# Altium PCB nrf52832_qfax_dcdc.PcbDoc
Units mm, origin at the board's own origin, x right, y up, seen from the top; angles counter-clockwise.
Board outline 19.99 x 19.99 mm, 2 copper layers (Top Layer, Bottom Layer), stack 1.671 mm thick; 24 components, 46 nets, 116 pads, 61 vias.
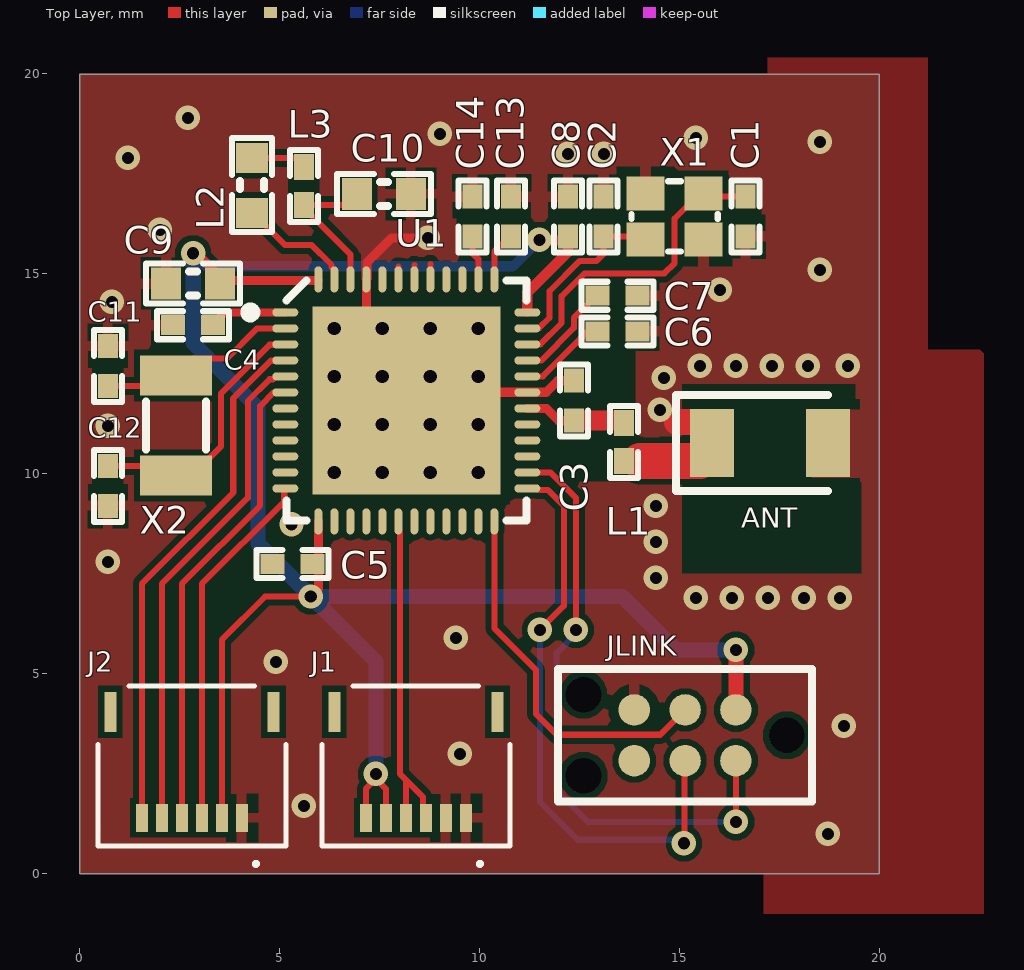
[diagram p0: Top Layer view]
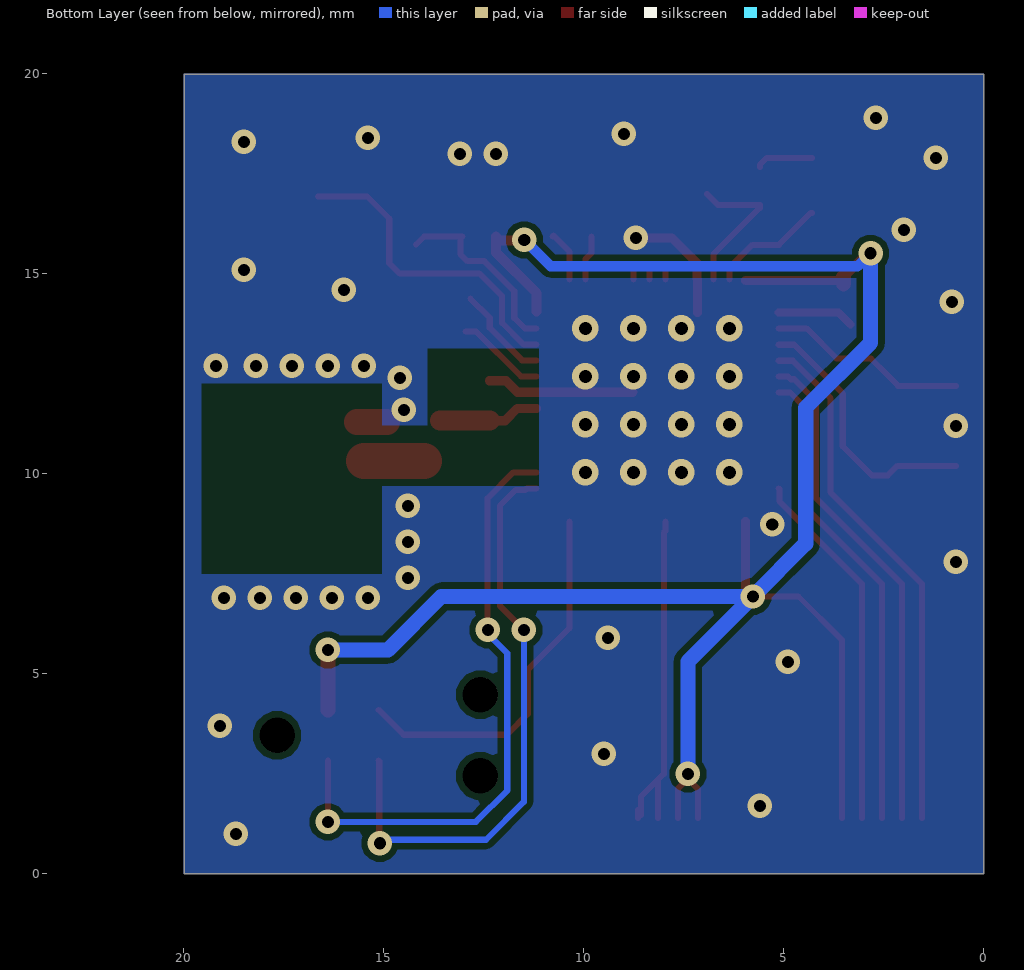
[diagram p1: Bottom Layer view, seen from below]
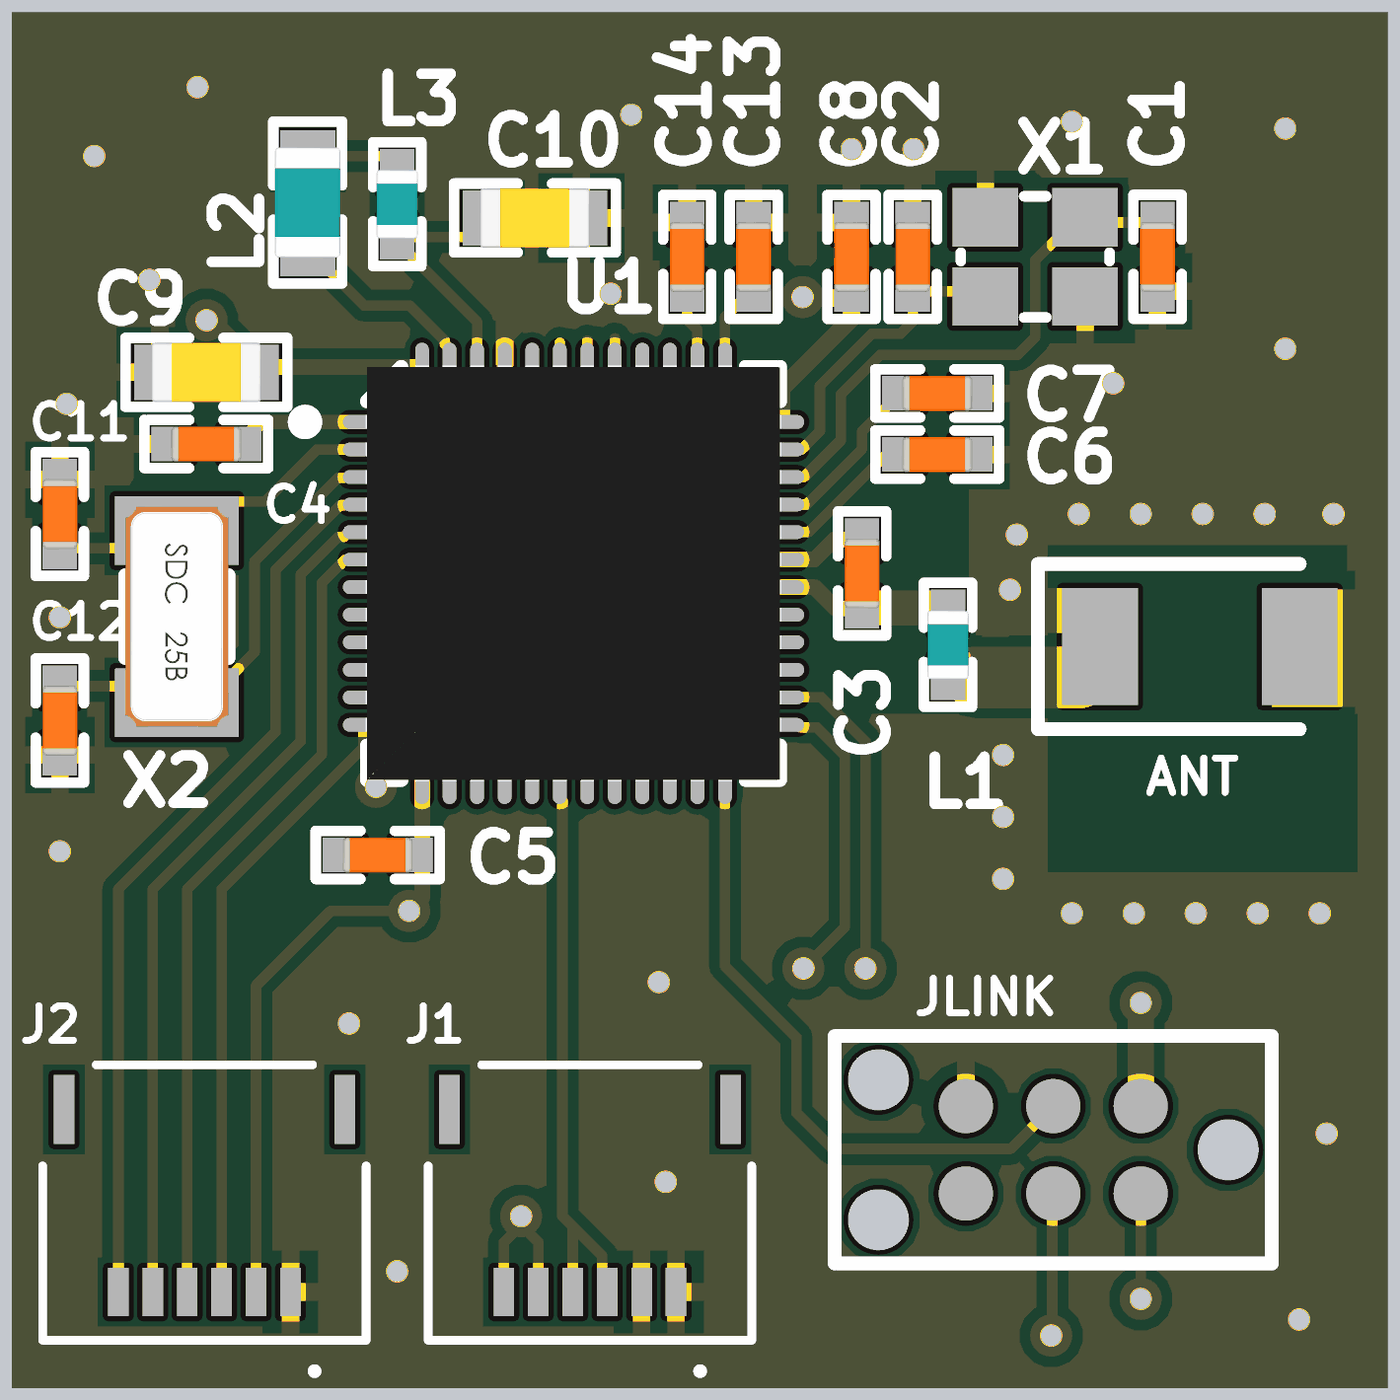
[diagram p2: 3D render of the assembled board from above, using the file's embedded part models]

## Layer stack, top to bottom
Top Solder: solder mask 0.0102, Solder Resist, Dk 3.5
Top Layer: signal copper 0.0356
Dielectric1: core 1.6002, FR-4, Dk 4.8
Bottom Layer: signal copper 0.0356
Bottom Solder: solder mask 0.0102, Solder Resist, Dk 3.5

## Board outline
0,0 0,19.99 19.99,19.99 19.99,0

## Design rules (kind name [scope] priority, off if disabled: settings)
Clearance Clearance_7 [InNamedPolygon('GND_L01_P004')] p1: gap=0.13 ignorepadtopadclearanceinfootprint=FALSE except(0: Arc-Hole Track-Hole SMDPad-Hole THPad-Hole Via-Hole Fill-Hole Poly-Hole Region-Hole Text-Hole)
Clearance Clearance_6 [InNamedPolygon('GND_L01_P004')] p2: gap=0.13 ignorepadtopadclearanceinfootprint=FALSE
Clearance Clearance_5 [InNamedPolygon('GND_L01_P001')] p3: gap=0.13 ignorepadtopadclearanceinfootprint=FALSE
Clearance Clearance_4 [InNamedPolygon('NONET_L01_P002')] p4: gap=0.254 ignorepadtopadclearanceinfootprint=FALSE except(0: Arc-Hole Track-Hole SMDPad-Hole THPad-Hole Via-Hole Fill-Hole Poly-Hole Region-Hole Text-Hole)
Clearance Clearance_3 [InNamedPolygon('GND_L01_P001')] p5: gap=0.13 ignorepadtopadclearanceinfootprint=FALSE
Clearance Clearance_2 [InNamedPolygon('GND_L01_P000')] p6: gap=0.13 ignorepadtopadclearanceinfootprint=FALSE
Clearance Clearance_1 [InNamedPolygon('GND_L01_P000')] p7: gap=0.13 ignorepadtopadclearanceinfootprint=FALSE
Clearance Polygon_ANT [(InNamedPolygon('Top_Layer-GND')) or (InNamedPolygon('Bottom_Layer-GND')) vs InNet('RF')] p8: gap=0.127 ignorepadtopadclearanceinfootprint=FALSE except(0: Arc-Hole Track-Hole SMDPad-Hole THPad-Hole Via-Hole Fill-Hole Poly-Hole Region-Hole Text-Hole)
Clearance Polygon [(InNamedPolygon('Top_Layer-GND')) or (InNamedPolygon('Bottom_Layer-GND'))] p9: gap=0.254 ignorepadtopadclearanceinfootprint=FALSE except(0: Arc-Hole Track-Hole SMDPad-Hole THPad-Hole Via-Hole Fill-Hole Poly-Hole Region-Hole Text-Hole)
Clearance [All] p10: gap=0.152 ignorepadtopadclearanceinfootprint=FALSE except(0: Arc-Hole Track-Hole SMDPad-Hole THPad-Hole Via-Hole Fill-Hole Poly-Hole Region-Hole Text-Hole)
ComponentClearance [All] p1 off: gap=0.254 collisioncheckmode=3 verticalgap=0.254 showdistances=FALSE
FabricationTestPointUsage TestPointUsage [All] p1: valid=0 allowmultiple=FALSE
FabricationTestpoint Testpoint [All] p1: side=3 testpointundercomponent=TRUE minsize=1.016 maxsize=2.54 preferedsize=1.524 minholesize=0 maxholesize=1.016 preferedholesize=0.813 testpointgrid=0.025 allowsidetop=TRUE allowsidebottom=TRUE usegrid=TRUE gridtolerance=0
Height [All] p1 off: minheight=0 maxheight=25.4 prefheight=12.7
HoleSize [All] p1: absolutevalues=TRUE maxlimit=4.064 minlimit=0.305 maxpercent=80.000 minpercent=20.000
MinimumAnnularRing [All] p1 off: minimumring=0.152
PolygonConnect PolygonConnect_2 [All vs IsNamedPolygon('GND_L01_P008')] p1: connectstyle=Direct reliefconductorwidth=0.254 reliefentries=4 polygonreliefangle="90 Angle" airgapwidth=0.254
PolygonConnect PolygonConnect_1 [isVia and innet(gnd)] p2: connectstyle=Direct reliefconductorwidth=0.254 reliefentries=4 polygonreliefangle="90 Angle" airgapwidth=0.254
PolygonConnect [All] p3: connectstyle=Relief reliefconductorwidth=0.254 reliefentries=4 polygonreliefangle="90 Angle" airgapwidth=0.254
RoutingVias [All] p1: holewidth=0.406 width=0.813 viastyle="Through Hole" minholewidth=0.254 minwidth=0.254 maxholewidth=0.711 maxwidth=1.27
SilkToSolderMaskClearance SilkscreenOverComponentPads [IsPad] p1: minsilkscreentomaskgap=0.254 clearancetoexposedcopper=TRUE
SolderMaskExpansion [All] p1: expansion=0.076 istentingtop=FALSE
Width [All] p1: maxlimit=2.54 minlimit=0.152 preferedwidth=0.152
24 further rules are at their usual default settings.

## Classes and differential pairs
polygon class PolygonClass_1: GND_L01_P001

## Components (designator, comment, footprint, x,y, rotation, side; value= is the part's Value field where it differs from the comment)
ANT "Comment" ANTC3216X115N 17.258,10.775 r0 top
C1 "12pF" CAPC1005X04L 16.645,16.435 r270 top
C2 "12pF" CAPC1005X04L 13.089,16.435 r90 top
C3 "0.8pF" CAPC1005X04L 12.352,11.837 r270 top
C4 "100nF" CAPC1005X04L 2.827,13.717 r180 top
C5 "100nF" CAPC1005X04L 5.317,7.748 r180 top
C6 "N.C." CAPC1005X04L 13.445,13.564 r180 top
C7 "100pF" CAPC1005X04L 13.445,14.453 r0 top
C8 "100nF" CAPC1005X04L 12.2,16.435 r90 top
C9 "4.7µF" CAPC1608X06L 2.827,14.758 r180 top
C10 "1.0µF" CAPC1608X06L 7.6,17 r180 top
C11 "12pF" CAPC1005X04L 0.7,12.7 r90 top
C12 "12pF" CAPC1005X04L 0.7,9.7 r270 top
C13 "12pF" CAPC1005X04L 10.777,16.435 r90 top
C14 "12pF" CAPC1005X04L 9.812,16.435 r90 top
J1 "5034800600" MOLEX_5034800600 8.4,2.8 r180 top
J2 "5034800600" MOLEX_5034800600 2.8,2.8 r180 top
JLINK "ICSP" TC2030-MCP-NL 17.67,3.465 r180 top (schematic designator C?)
L1 "3.9nH" INDC1005X04L 13.6,10.8 r270 top
L2 "10µH" INDC1608X06L 4.3,17.225 r270 top
L3 "15nH" INDC1005X04L 5.6,17.2 r90 top
U1 "nRF52832-QFAB" QFN40P600X600X90-48N 8.161,11.837 r0 top locked
X1 "32MHz" BT-XTAL_2016 14.867,16.435 r180 top
X2 "32.768kHz" XTAL_3215 2.4,11.21 r270 top

## Footprints (in the part's own frame and the unit in brackets; to place one, negate y for a bottom-side part, rotate by r counter-clockwise, add the part's x,y. Pads: shape width x height; smd on the part's side, far side on the other; paste and mask are expansions set on the pad)
ANTC3216X115N [mm]
  rect 1.1x1.7 smd: 1(-1.45,0) 2(1.45,0)
  silkscreen extent -2.35,-1.2 1.45,1.2
BT-XTAL_2016 [mm] "Crystal 2.0 x 1.6 mm"
  rect 0.95x0.85 smd: 1(-0.725,-0.575) 2(0.725,-0.575) 3(0.725,0.575) 4(-0.725,0.575)
  silkscreen extent -1.08,-0.88 1.08,0.88
CAPC1005X04L [mm] "Chip Capacitor, 2-Leads, Body 1.0x0.5mm, IPC High Density"
  rect 0.6x0.5 smd: 1(-0.5,0) 2(0.5,0)
  silkscreen extent -0.9,-0.35 0.9,0.35, body extent -0.51,-0.25 0.51,0.25, height 0.5
CAPC1608X06L [mm] "Chip Capacitor, 2-Leads, Body 1.6x0.8mm, IPC High Density"
  rect 0.75x0.8 smd: 1(-0.675,0) 2(0.675,0)
  silkscreen extent -1.17,-0.5 1.17,0.5, body extent -0.8,-0.43 0.8,0.43, height 0.8
INDC1005X04L [mm] "Chip Inductor, 2-Leads, Body 1.0x0.5mm, IPC High Density"
  rect 0.65x0.5 smd: 1(-0.475,0) 2(0.475,0)
  silkscreen extent -0.9,-0.35 0.9,0.35, body extent -0.5,-0.3 0.5,0.3, height 0.5
INDC1608X06L [mm] "Chip Inductor, 2-Leads, Body 1.6x0.8mm, IPC High Density"
  rect 0.75x0.8 smd: 1(-0.675,0) 2(0.7,0)
  silkscreen extent -1.18,-0.5 1.17,0.5, body extent -0.8,-0.48 0.8,0.48, height 0.8
MOLEX_5034800600 [mm]
  rect 0.3x0.7 smd: 1(-1.25,1.4) 2(-0.75,1.4) 3(-0.25,1.4) 4(0.25,1.4) 5(0.75,1.4) 6(1.25,1.4)
  rect 0.3x1 smd: S1(-2.04,-1.25) S2(2.04,-1.25)
  silkscreen extent -2.35,-1.9 2.35,2.6
QFN40P600X600X90-48N [mm] "QFN, 48-Leads, Body 6,0x6,0mm (max), Pitch 0,40mm, IPC Medium Density"
  oval 0.65x0.2 smd: 1(-3.025,2.2) 2(-3.025,1.8) 3(-3.025,1.4) 4(-3.025,1) 5(-3.025,0.6) 6(-3.025,0.2) 7(-3.025,-0.2) 8(-3.025,-0.6) 9(-3.025,-1) 10(-3.025,-1.4) 11(-3.025,-1.8) 12(-3.025,-2.2) 25(3.025,-2.2) 26(3.025,-1.8) 27(3.025,-1.4) 28(3.025,-1) 29(3.025,-0.6) 30(3.025,-0.2) 31(3.025,0.2) 32(3.025,0.6) 33(3.025,1) 34(3.025,1.4) 35(3.025,1.8) 36(3.025,2.2)
  oval 0.2x0.65 smd: 13(-2.2,-3.025) 14(-1.8,-3.025) 15(-1.4,-3.025) 16(-1,-3.025) 17(-0.6,-3.025) 18(-0.2,-3.025) 19(0.2,-3.025) 20(0.6,-3.025) 21(1,-3.025) 22(1.4,-3.025) 23(1.8,-3.025) 24(2.2,-3.025) 37(2.2,3.025) 38(1.8,3.025) 39(1.4,3.025) 40(1,3.025) 41(0.6,3.025) 42(0.2,3.025) 43(-0.2,3.025) 44(-0.6,3.025) 45(-1,3.025) 46(-1.4,3.025) 47(-1.8,3.025) 48(-2.2,3.025)
  rect 4.7x4.7 smd: 49(0,0)
  silkscreen extent -4.02,-3 3,3, body extent -3.02,-3.02 3.02,3.02, height 0.86
TC2030-MCP-NL [mil]
  round 31 smd: 1(50,-25) 2(50,25) 3(100,-25) 4(100,25) 5(150,-25) 6(150,25)
  round 34 hole 35 unplated: A(0,0) B(200,40) C(200,-40)
  silkscreen extent -25,-65 225,65
XTAL_3215 [mm] "XTAL SMD 3.2 x 1.5 mm"
  rect 1x1.8 smd: 1(-1.25,0) 2(1.25,0)
  silkscreen extent -0.6,-0.75 0.6,0.75, body extent -1.6,-0.75 1.6,0.75, height 0.81

## Part data
C1 C2 C11 C12 C13 C14: library part C0402-12p, "Capacitor, NP0, ±2%", Artikkelnr Noca=20029159, Artikkelnr Simpro=N.A., Footprint Doc=0402, LatestRevisionDate=2011-05-11, Note=50V, Part Number=C0402-12p, Pin Count=2, Published=2009-05-08, Publisher="Nordic Semiconductor"
C3: library part C0402-0.8p, "Capacitor, NP0, ±5%", Artikkelnr Noca=20029147, Artikkelnr Simpro=N.A., Footprint Doc=0402, LatestRevisionDate=2012-11-21, Note=50V, Part Number=C0402-0.8p, Pin Count=2, Published=2009-05-08, Publisher="Nordic Semiconductor"
C4 C5 C8: library part C0402-100n, "Capacitor, X7R, ±10%", Artikkelnr Noca=20039200, Artikkelnr Simpro=N.A., Footprint Doc=0402, LatestRevisionDate=2009-11-23, Note=16V, Part Number=C0402-100n, Pin Count=2, Published=2009-05-08, Publisher="Nordic Semiconductor"
C6: library part C0402-N.C., "Not mounted", Artikkelnr Noca=N.A., Artikkelnr Simpro=N.A., Footprint Doc=0402, LatestRevisionDate=2009-05-08, Note="Chip Cap", Part Number=C0402-N.C., Pin Count=2, Published=2009-05-08, Publisher="Nordic Semiconductor"
C7: library part C0402-100p, "Capacitor, NP0, ±5%", Artikkelnr Noca=20029135, Artikkelnr Simpro=N.A., Footprint Doc=0402, LatestRevisionDate=2009-05-08, Note=50V, Part Number=C0402-100p, Pin Count=2, Published=2009-05-08, Publisher="Nordic Semiconductor"
C9: library part C0603-4µ7, "Capacitor, X5R, ±10%", Artikkelnr Noca=20069060, Artikkelnr Simpro=N.A., Footprint Doc=0603, LatestRevisionDate=2009-11-23, Note=6.3V, Part Number=C0603-4µ7, Pin Count=2, Published=2009-05-08, Publisher="Nordic Semiconductor"
C10: library part C0603-1µ0, "Capacitor, X7R, ±10%", Artikkelnr Noca=20039335, Artikkelnr Simpro=N.A., Footprint Doc=0603, LatestRevisionDate=2013-06-05, Note=16V, Part Number=C0603-1µ0, Pin Count=2, Published=2009-05-08, Publisher="Nordic Semiconductor"
J1 J2: library part CMP-011-000000-1, "6 Position FFC, FPC Connector Contacts, Top and Bottom 0.020 _0.50mm_ Surface Mount, Right Angle", Package=None, Availability=Unavailable, Component Type=Standard, Design Item ID=5034800600, MF=Molex, MP=5034800600, Pin Count=8, Price=None, SnapEDA_Link=https://www.snapeda.com/parts/5034800600/Molex/view-part/1319072/?ref=snap, Source=SnapEDAsch.SchLib
L1: library part L0402-3n9, "High frequency chip inductor ±5%", Manufacturer=Murata, Manufacturer Part Number=LQP15MN3N9B02D, Supplier part number=490-1131-1-ND, Artikkelnr Noca=33029151, Artikkelnr Simpro=N.A., Datasheet=http://search.murata.co.jp/Ceramy/image/img/PDF/ENG/L0075S0084LQP15M.pdf, Footprint Doc=0402, LatestRevisionDate=2012-09-19, Note="High frequency chip inductor ±5%", Part Number=L0402-3n9, Pin Count=2, Published=2009-05-08, Publisher="Nordic Semiconductor", Supplier=Digi-Key
L2: library part L0603-10µ, "Chip inductor, IDC,min = 50 mA, ±20%", 2nd source part number=178-6105, Manufacturer="Taiyo Yuden", Manufacturer Part Number=LBMF1608T100K, Supplier part number=587-1714-1-ND, 2nd source Supplier=Farnell, Artikkelnr Noca=33029314, Artikkelnr Simpro=N.A., Datasheet=http://www.yuden.co.jp/ut/product/pdf/elb2_e.pdf, Footprint Doc=0603, LatestRevisionDate=2012-09-19, Note="LBMF1608T100K 10µH 80mA 0603", Part Number=L0603-10µ, Pin Count=2, Published=2010-02-24, Publisher="Nordic Semiconductor", Supplier=Digi-Key
L3: library part L0402-15n, "High frequency chip inductor ±10%", 2nd source part number=658-1328, Manufacturer="Taiyo Yuden", Manufacturer Part Number=HK100515NJ-T, Supplier part number=587-1521-1-ND, 2nd source Supplier=Farnell, Artikkelnr Noca=33029323, Artikkelnr Simpro=N.A., Datasheet=http://www.yuden.co.jp/productdata/catalog/en/mlci04_e.pdf, Footprint Doc=0402, LatestRevisionDate=2012-09-19, Note="High frequency chip inductor ±10%", Part Number=L0402-15n, Pin Count=2, Published=2010-07-12, Publisher="Nordic Semiconductor", Supplier=Digi-Key
U1: "Multi-protocol Bluetooth Low Energy, ANT and 2.4GHz proprietary system-on-chip", Manufacturer="Nordic Semiconductor", Artikkelnr Noca=N.A., Artikkelnr Simpro=N.A., Footprint Doc=QFN-48, LatestRevisionDate=2016-11-24, Manufacturer Part Number=nRF52832-QFAB, Part Number=nRF52832-QFAB, Pin Count=48, Published=2016-11-24, Publisher="Nordic Semiconductor", Supplier="Nordic Semiconductor"
X1: library part XTAL_SMD2016_32MHz_8pF_General, "XTAL SMD 2016, 32MHz, Cl=8pF, Total Tol: ±40ppm", Artikkelnr Noca=N.A., Artikkelnr Simpro=N.A., Footprint Doc=XTAL_2016, LatestRevisionDate=2016-08-19, Note="XTAL SMD 32.000MHz", Part Number=XTAL_SMD2016_32MHz_8pF_General, Pin Count=4, Published=2016-08-19, Publisher="Nordic Semiconductor"
X2: library part XTAL_SMD3215_32.768kHz_9pF_General, "XTAL SMD 3215, 32.768kHz, Cl=9pF, Total Tol: ±50ppm", Artikkelnr Noca=N.A., Artikkelnr Simpro=N.A., Footprint Doc=XTAL_3215, LatestRevisionDate=2016-08-19, Note="XTAL SMD 32.768kHz", Part Number=XTAL_SMD3215_32.768kHz_9pF_General, Pin Count=2, Published=2016-08-19, Publisher="Nordic Semiconductor"

## Via types
v1: diameter 0.61, hole 0.305, Top Layer to Bottom Layer, tented both sides, 45 vias
v2: diameter 0.66, hole 0.33, Top Layer to Bottom Layer, tented both sides, 16 vias

## Nets (pads, with @x,y where several pads share a name; then routed paths per layer and width w, separated by ;. In a path a pad name is that pad's centre, name@x,y a point inside that pad or via, vN(x,y) a via of type N, cw(c..) or ccw(c..) an arc to the next point about the centre after c; other vN are vias at no path point)
DEC1: C4.1 U1.1 | length 1.9
  Top Layer w0.203: C4.1@3.331,13.736 3.632,14.037 U1.1
DEC2: C6.2 U1.32 | length 2.2
  Top Layer w0.152: U1.32 11.573,12.437 12.7,13.564 C6.2@12.962,13.564
DEC3: C7.1 U1.33 | length 2.4
  Top Layer w0.152: U1.33 11.541,12.837 12.352,13.648 12.352,13.899 C7.1@12.837,14.384
DEC4: C10.2 L3.1 U1.46 | length 3.8
  Top Layer w0.152: U1.46 6.761,15.489 5.6,16.65 L3.1 6.65,16.725 C10.2
GND: ANT.2 C1.2 C2.2 C3.1 C4.2 C5.2 C6.1 C7.2 C8.2 C9.2 C10.1 C11.2 C12.2 C13.2 C14.2 J1.1 J1.2 J2.1 JLINK.5 U1.31 U1.45 U1.49 X1.2 X1.4 | length 8
  Top Layer w0.152: v1(14.5,11.6) 14.624,11.6 14.924,11.3
  Top Layer w0.229: U1.49@7.161,14.037 U1.45 7.176,14.877 7.176,15.276 7.8,15.9 v1(8.7,15.9) ; U1.49@8.779,12.04 11.661,12.04 11.948,12.327 C3.1@12.36,12.327
  Top Layer w0.65: 14.924,11.3 15.675,11.3
  other v1: 18.7,1 5.6,1.7 9.5,3 19.1,3.7 4.9,5.3 9.4,5.9 15.4,6.9 16.3,6.9 17.2,6.9 18.1,6.9 19,6.9 14.4,7.4 0.7,7.8 14.4,8.3 5.292,8.737 14.4,9.2 0.7,11.2 14.6,12.4 15.5,12.7 16.4,12.7 17.3,12.7 18.2,12.7 19.2,12.7 0.8,14.3 16,14.6 18.5,15.1 2,16.1 1.2,17.9 12.2,18 13.1,18 18.5,18.3 15.4,18.4 9,18.5 2.7,18.9
  other v2: 6.361,10.037 7.561,10.037 8.761,10.037 9.961,10.037 6.361,11.237 7.561,11.237 8.761,11.237 9.961,11.237 6.361,12.437 7.561,12.437 8.761,12.437 9.961,12.437 6.361,13.637 7.561,13.637 8.761,13.637 9.961,13.637
NetANT?_G1: 
NetC3_2: C3.2 L1.1 U1.30 | length 2.5
  Top Layer w0.229: U1.30 11.661,11.637 11.971,11.327 C3.2@12.36,11.327
  Top Layer w0.508: C3.2@12.356,11.332 L1.1@13.596,11.332
NetC?_2: JLINK.2 U1.26 | length 15.3
  Top Layer w0.152: U1.26 11.763,10.037 12.405,9.395 12.405,6.105 v1(12.4,6.1) ; v1(16.4,1.3) JLINK.2
  Bottom Layer w0.152: v1(12.4,6.1) 12.4,6 11.917,5.517 11.917,2.083 12.7,1.3 v1(16.4,1.3)
NetL2_1: L2.1 L3.2 | length 1.4
  Top Layer w0.152: L2.1 5.426,17.9 5.6,17.726 L3.2
NetL2_2: L2.2 U1.47 | length 2.9
  Top Layer w0.152: L2.2 4.325,16.525 5.125,15.725 5.789,15.725 6.29,15.223 6.29,15.171 6.361,15.1 U1.47
P0.00/XL1: C11.1 U1.2 X2.1 | length 5
  Top Layer w0.152: C11.1 2.14,12.2 X2.1 2.824,12.884 3.68,12.884 4.433,13.637 U1.2
P0.01/XL2: C12.1 U1.3 X2.2 | length 6.7
  Top Layer w0.152: C12.1 2.16,10.2 X2.2 2.8,9.96 3.529,10.689 3.529,12.012 4.744,13.228 5.127,13.228 U1.3
P0.02/AIN0: J2.6 U1.4 | length 13.1
  Top Layer w0.152: J2.6 1.55,7.25 3.833,9.533 3.833,11.886 4.775,12.828 5.127,12.828 U1.4
P0.03/AIN1: J2.5 U1.5 | length 12.5
  Top Layer w0.152: J2.5 2.05,7.25 4.2,9.4 4.2,11.822 4.744,12.366 4.827,12.366 4.899,12.437 U1.5
P0.04/AIN2: J2.4 U1.6 | length 11.9
  Top Layer w0.152: J2.4 2.55,7.25 4.505,9.205 4.505,11.695 4.847,12.037 4.899,12.037 U1.6
P0.05/AIN3: U1.7
P0.07: U1.9
P0.08: U1.10
P0.09: U1.11
P0.10: J2.3 U1.12 | length 9.1
  Top Layer w0.152: J2.3 3.05,7.25 5.109,9.309 5.109,9.615 5.131,9.637 U1.12
P0.11: U1.14
P0.12: U1.15
P0.13: U1.16
P0.14: U1.17
P0.15: J1.3 J1.4 U1.18 | length 8.8
  Top Layer w0.152: U1.18 7.961,8.574 8,8.536 8,2.5 8.15,2.35 ; J1.4 8.15,2.35 ; J1.3@8.65,1.6 J1.3 8.576,1.474 8.576,1.924 8.15,2.35
P0.16: U1.19
P0.17: U1.20
P0.18: U1.21
P0.19: U1.22
P0.20: U1.23
P0.21: JLINK.3 U1.24 | length 9.4
  Top Layer w0.152: U1.24 10.361,6.139 11.4,5.1 11.4,4 11.922,3.478 14.508,3.478 JLINK.3
P0.22: U1.27
P0.23: U1.28
P0.24: U1.29
P0.25: C13.1 U1.37 | length 1.3
  Top Layer w0.152: U1.37 10.361,15.562 10.756,15.956 C13.1
P0.26: C14.1 U1.38 | length 1.1
  Top Layer w0.152: C14.1 9.812,15.52 9.961,15.371 U1.38
P0.27: U1.39
P0.28/AIN4: U1.40
P0.29/AIN5: U1.41 | length 0.4
  Top Layer w0.152: U1.41 8.761,15.25
P0.30/AIN6: U1.42 | length 0.4
  Top Layer w0.152: U1.42 8.361,15.219
P0.31/AIN7: U1.43 | length 0.3
  Top Layer w0.152: U1.43 7.961,15.188
RF: L1.2 | length 1.5
  Top Layer w0.9: 14,10.325 15.5,10.325
SWDCLK: JLINK.4 U1.25 | length 14.8
  Top Layer w0.152: U1.25 11.424,9.637 11.461,9.6 11.7,9.6 12.1,9.2 12.1,6.7 v1(11.5,6.1) ; v1(15.1,0.767) 15.115,0.782 15.115,2.815 JLINK.4
  Bottom Layer w0.152: v1(11.5,6.1) 11.5,1.8 12.447,0.853 15.013,0.853 v1(15.1,0.767)
VDD_NRF: C5.1 C8.1 C9.1 J1.5 J1.6 J2.2 JLINK.1 U1.13 U1.36 U1.48 | length 54.6
  Top Layer w0.152: J2.2 3.55,5.85 4.635,6.935 v1(5.774,6.935) ; J1.6 7.15,2.126 v1@7.4,2.376 ; v1(7.4,2.5) v1@7.4,2.376 ; J1.5 7.65,2.126 v1@7.4,2.376
  Top Layer w0.229: v1(2.831,15.514) 2.914,15.514 3.506,14.922 3.591,14.837 U1.48@5.952,14.837 ; v1(5.774,6.935) 5.961,7.123 U1.13
  Top Layer w0.254: U1.36@11.184,14.065 11.184,14.525 12.2,15.541 C8.1@12.2,15.833 ; v1(11.489,15.851) 11.506,15.833 C8.1@12.2,15.833 ; C8.1 C8.1@12.2,15.833
  Top Layer w0.381: C9.1@3.506,14.752 C9.1@3.506,14.922 ; JLINK.1 v1(16.4,5.6)
  Bottom Layer w0.254: v1(2.831,15.514) 3.156,15.19 10.828,15.19 v1(11.489,15.851)
  Bottom Layer w0.381: v1(2.831,15.514) 2.831,13.276 4.454,11.653 4.454,8.255 v1(5.774,6.935) ; v1(7.4,2.5) 7.4,5.309 v1(5.774,6.935) ; v1(16.4,5.6) 14.9,5.6 13.565,6.935 v1(5.774,6.935)
XC1: C1.1 U1.34 X1.1 | length 8
  Top Layer w0.152: U1.34 11.51,13.237 12.045,13.772 12.045,14.44 12.617,15.012 14.613,15.012 14.867,15.266 14.867,16.384 15.418,16.935 C1.1
XC2: C2.1 U1.35 X1.3 | length 4.7
  Top Layer w0.152: U1.35 11.476,13.637 11.74,13.901 11.74,14.57 12.487,15.317 12.911,15.317 13.089,15.495 C2.1@13.089,15.927 ; C2.1@13.038,15.935 13.995,15.935 X1.3@14.195,15.735
pads on no net: ANT.1 J1.S1 J1.S2 J2.S1 J2.S2 JLINK.6 JLINK.A JLINK.B JLINK.C U1.8 U1.44

## Polygon pours and split planes (outlines as drawn)
GND on Top Layer "GND_L01_P011" (solid, pour order 11): 17.1,7.7 19.2,7.7 19.3,7.8 19.3,13.1 22.5,13.1 22.6,13 22.6,-1 17.1,-1
GND on Top Layer "GND_L01_P009" (solid, pour order 9): 21.2,20.4 17.2,20.4 17.2,12.2 21.2,12.2
GND on Top Layer "GND_L01_P008" (solid, pour order 8): 18.3,11.6 18.3,9.9 19.8,9.9 19.8,11.6
GND on Top Layer "GND_L01_P004" (solid, pour order 4): 12.7,10.1 13.4,10.8 14.1,10.8 14.1,12.9 15.7,12.9 15.7,7.5 12.7,7.5
GND on Top Layer "GND_L01_P005" (solid, pour order 5): 0,20 17.8,20 17.8,0 0,0
GND on Bottom Layer "GND_L02_P007" (solid, pour order 7): 0,20 20,20 20,0 0,0

## Other copper
Top Layer:
  pour cut-out: 18.2,12.25 19.401,12.25 19.4,12.249 19.4,11.7 18.2,11.7
  pour cut-out: 18.2,9.8 19.4,9.8 19.402,9.798 19.552,9.798 19.552,7.502 19.55,7.5 18.2,7.5
  pour cut-out: 18.2,12.25 15.05,12.25 15.05,7.5 18.2,7.5
  pour cut-out: 13.9,9.8 11.133,9.8 11.133,13.133 13.9,13.133
Bottom Layer:
  pour cut-out: 13.3,11.2 15.2,11.2 15.2,9.7 13.3,9.7
  pour cut-out: 11.133,9.7 11.133,13.133 13.9,13.133 13.9,9.7
  pour cut-out: 15.05,12.25 19.55,12.25 19.55,7.5 15.05,7.5